# Altium PCB SW6121 Demo board.PcbDoc
Units mm, origin at the board's own origin, x right, y up, seen from the top; angles counter-clockwise.
Board outline 63.98 x 26 mm, 4 copper layers (Top Layer, Signal, power, Bottom Layer); 40 components, 37 nets, 159 pads, 294 vias.
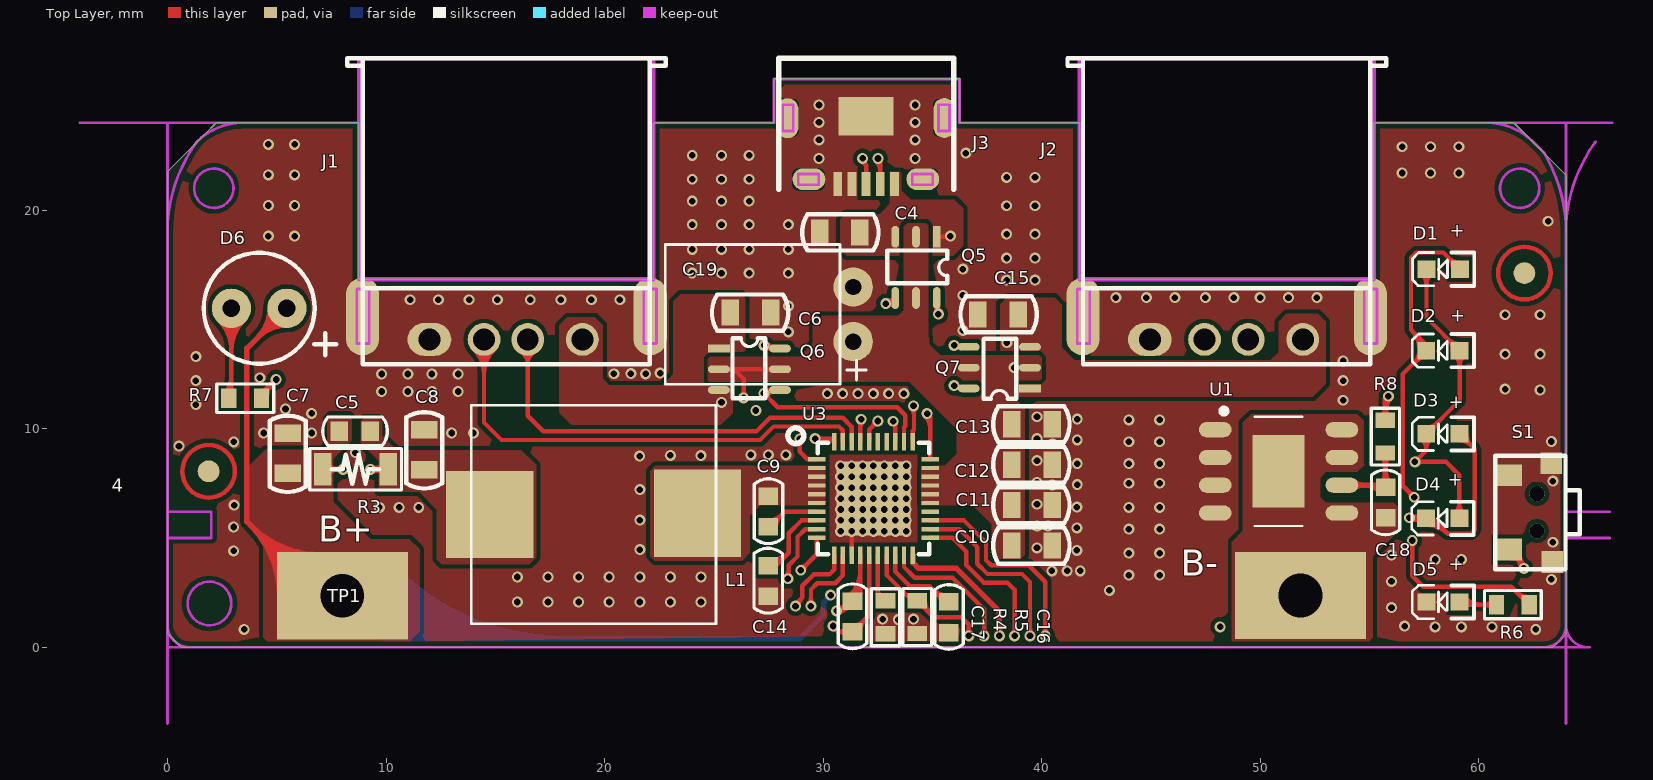
[diagram p0: Top Layer view]
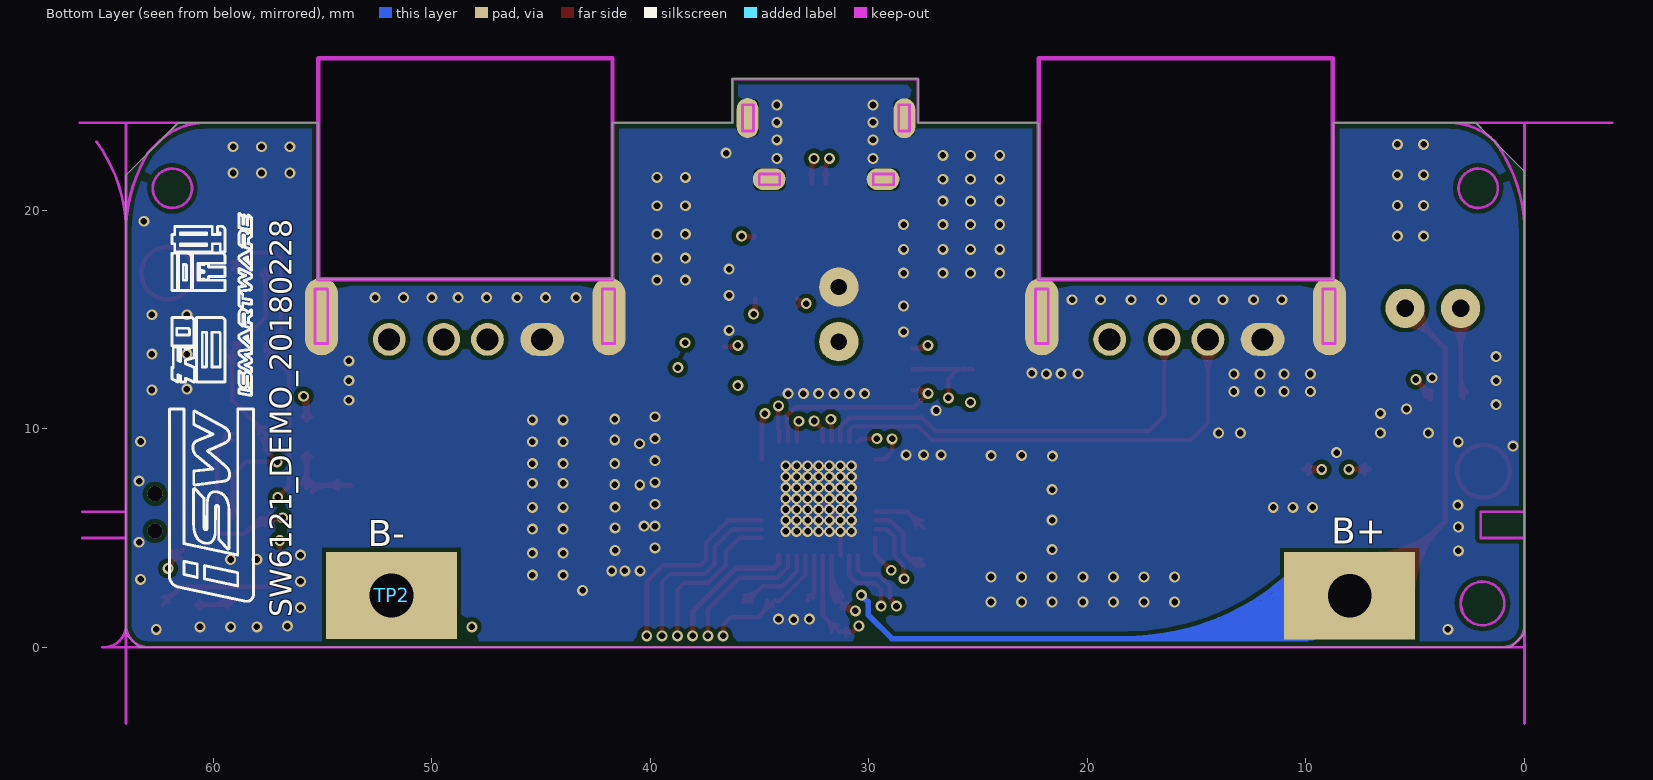
[diagram p1: Bottom Layer view, seen from below]
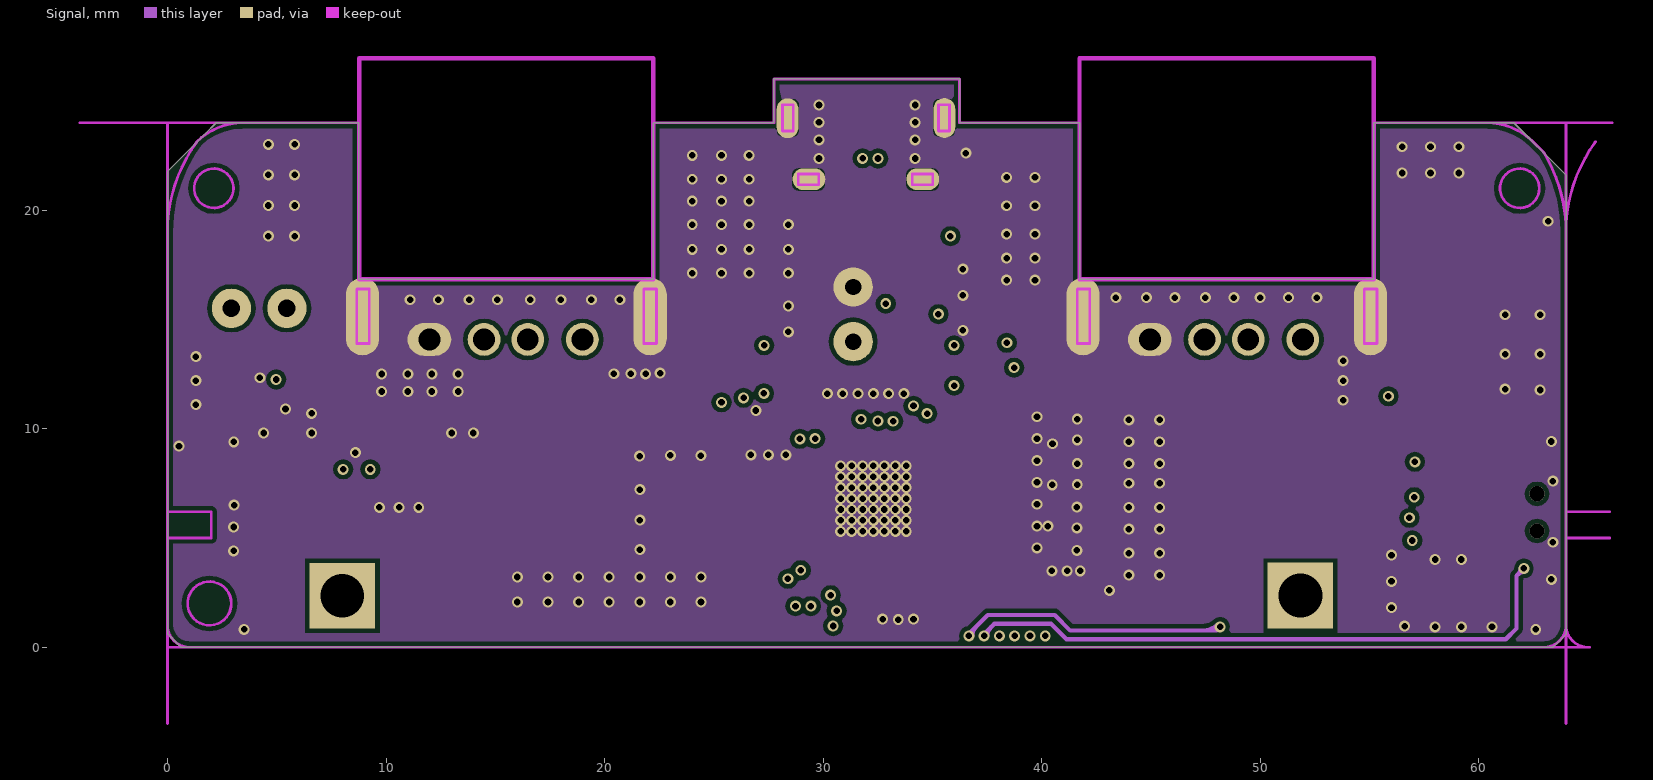
[diagram p2: Signal]
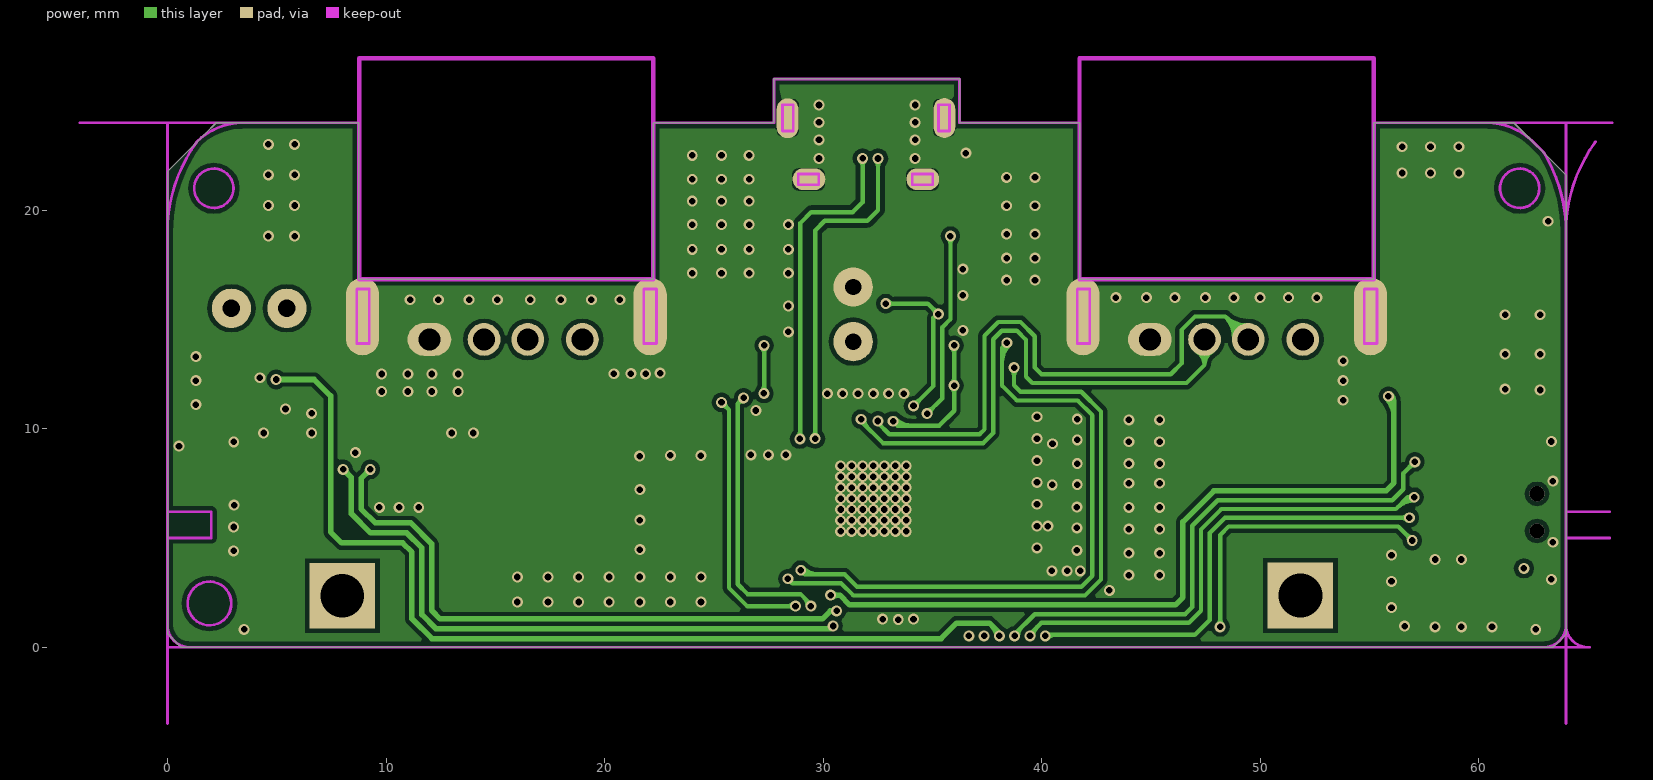
[diagram p3: power]

## Layer stack, top to bottom
Top Layer: signal copper 0.0356
Dielectric: core 0.32, FR-4, Dk 4.8
Signal: signal copper 0.0356
Dielectric: prepreg 0.32, FR-4, Dk 4.8
power: signal copper 0.0356
Dielectric: core 0.32, FR-4, Dk 4.8
Bottom Layer: signal copper 0.0356

## Board outline
1.084,0 0.623,0 0.131,0.492 0.022,0.601 0.022,2.061 0.022,21.787 1.718,23.483 2.235,24 8.754,24 8.754,16.855 8.767,16.841 22.227,16.841 22.227,23.957 22.27,24 27.75,24 27.75,26 27.753,26.003 36.264,26.003 36.264,24.003 36.266,24 41.749,24 41.749,16.853 41.737,16.841 55.197,16.841 55.197,23.977 55.22,24 60.376,24 61.606,24 63.196,22.41 64,21.606 64,19 64,0.583 63.563,0.146 63.42,0.003 63.014,0.003

## Design rules (kind name [scope] priority, off if disabled: settings)
Clearance [All] p1: gap=0.2
ComponentClearance [All] p1 off: gap=0.254 collisioncheckmode=3 verticalgap=0.254 showdistances=FALSE
FabricationTestpoint [(IsPad And (OnTopLayer Or OnBottomLayer))] p1: side=3 testpointundercomponent=TRUE minsize=1.016 maxsize=2.54 preferedsize=1.524 minholesize=0 maxholesize=1.016 preferedholesize=0.813 testpointgrid=0.025 allowsidetop=TRUE allowsidebottom=TRUE usegrid=TRUE gridtolerance=0
PolygonConnect [All] p1: connectstyle=Direct reliefconductorwidth=0.254 reliefentries=4 polygonreliefangle="90 Angle"
RoutingVias [All] p1: holewidth=0.4 width=0.6 viastyle="Through Hole" minholewidth=0.4 minwidth=0.6 maxholewidth=0.4 maxwidth=0.6
SilkscreenOverComponentPads [IsPad] p1: minsilkscreentomaskgap=0.254
SolderMaskExpansion [All] p1: expansion=0.102
Width [All] p1: maxlimit=2 minlimit=0.2 preferedwidth=0.2
25 further rules are at their usual default settings.

## Classes and differential pairs
component class SW6124_DEMO四层板: C4 C5 C6 C7 C8 C9 C10 C11 C12 C13 C14 C15 C16 D1 D2 D3 D4 D5 D6 J1 J3 L1 Q5 Q6 Q7 R3 R4 R5 R6 R7 S1 TP1 TP2

## Components (designator, comment, footprint, x,y, rotation, side; value= is the part's Value field where it differs from the comment)
C4 "C0805" C0805 30.79,18.98 r0 top
C5 "C0603" C0603 8.57,9.882 r180 top
C6 "C0805" C0805 26.664,15.312 r180 top
C7 "C0805" C0805 5.5,8.85 r270 top
C8 "C0805" C0805 11.75,9.01 r270 top
C9 "C0603" C0603 27.5,6.21 r270 top
C10 "C0805" C0805 39.53,6.5 r180 top
C11 "C0805" C0805 39.53,4.65 r180 top
C12 "C0805" C0805 39.53,10.2 r180 top
C13 "C0805" C0805 39.53,8.35 r180 top
C14 "C0603" C0603 27.49,3.03 r270 top
C15 "C0805" C0805 38.04,15.23 r0 top
C16 "C0603" C0603 35.76,1.37 r270 top
C17 "C0603" C0603 31.35,1.4 r270 top (schematic designator C3)
C18 "C0603" C0603 55.744,6.612 r270 top (schematic designator C3)
C19 "Comment" 点解电容6.3*8 30.78,15.23 r90 top
D1 "LED" LED_0603 59.155,17.241 r180 top locked
D2 "LED" LED_0603 59.142,13.513 r180 top locked
D3 "LED" LED_0603 59.142,9.703 r180 top locked
D4 "LED" LED_0603 59.13,5.836 r180 top locked
D5 "LED" LED_0603 59.144,2.01 r180 top locked
D6 "LED_5MM" LED_5MM 4.196,15.51 r180 top
J1 "TYPE-A-1" USB-A-06 15.52,14.6 r180 top locked
J2 "TYPE-A-1" USB-A-06 48.49,14.6 r180 top locked (schematic designator J1)
J3 "USB_MICRO_B" UMB05H217 31.953,22.755 r0 top locked (schematic designator U2)
L1 "SPM10102R2MESN" INDUCTOR_SPM1010 19.73,6.02 r180 top
Q5 "8205" SOT23-6 34.256,17.38 r180 top
Q6 "8205" SOT23-6 26.632,12.718 r270 top
Q7 "8205" SOT23-6 38.07,12.79 r90 top
R3 "R1206" R1206 8.61,8.14 r0 top
R4 "R0603" R0603 32.86,1.32 r270 top
R5 "R0603" R0603 34.31,1.33 r270 top
R6 "R0603" R0603 61.52,1.944 r180 top
R7 "R0603" R0603 3.507,11.391 r180 top
R8 "R0603" R0603 55.734,9.582 r270 top (schematic designator R4)
S1 "KEY" SMDTO024 63.382,3.909 r270 top locked
TP1 "B+" TIP_4*6 8.004,2.304 r0 top
TP2 "B-" TIP_4*6 51.846,2.312 r180 bottom
U1 "Comment" SOP-8-G 50.844,8.049 r0 top
U3 "Comment" QFN40_EPAD_SW6121_5X5 32.307,6.8 r0 top locked

## Footprints (in the part's own frame and the unit in brackets; to place one, negate y for a bottom-side part, rotate by r counter-clockwise, add the part's x,y. Pads: shape width x height; smd on the part's side, far side on the other; paste and mask are expansions set on the pad)
C0603 [mm]
  rect 0.8x0.9 smd: 1(0.7,0) 2(-0.7,0)
  silkscreen extent -1.49,-0.65 1.47,0.65, body extent -0.8,-0.4 0.8,0.4, height 0.8
C0805 [mm]
  rect 0.8x1.2 smd: 1(-0.95,0) 2(0.9,0)
  silkscreen extent -1.75,-0.82 1.75,0.82, body extent -1,-0.6 1,0.6, height 1.2
INDUCTOR_SPM1010 [mm]
  rect 4x4 smd: 1(4.975,-0.05) 2(-4.525,-0.1)
  silkscreen extent -5.38,-5.05 5.82,4.95
LED_5MM [mm]
  round 1.8 hole 0.8: 1(-1.27,0) 2(1.27,0)
  silkscreen extent -3.53,-2.54 2.54,2.54
LED_0603 [mm]
  rect 0.82x0.8 smd: 1(0.013,-0.057) 2(1.537,-0.057)
  silkscreen extent -0.65,-0.82 2.18,0.7
QFN40_EPAD_SW6121_5X5 [mm]
  rect 0.8x0.2 smd: 1(-2.6,1.8) 2(-2.6,1.4) 3(-2.6,1) 4(-2.6,0.6) 5(-2.6,0.2) 6(-2.6,-0.2) 7(-2.6,-0.6) 8(-2.6,-1) 9(-2.6,-1.4) 10(-2.6,-1.8) 21(2.6,-1.8) 22(2.6,-1.4) 23(2.6,-1) 24(2.6,-0.6) 25(2.6,-0.2) 26(2.6,0.2) 27(2.6,0.6) 28(2.6,1) 29(2.6,1.4) 30(2.6,1.8)
  rect 0.2x0.8 smd: 11(-1.8,-2.6) 12(-1.4,-2.6) 13(-1,-2.6) 14(-0.6,-2.6) 15(-0.2,-2.6) 16(0.2,-2.6) 17(0.6,-2.6) 18(1,-2.6) 19(1.4,-2.6) 20(1.8,-2.6) 31(1.8,2.6) 32(1.4,2.6) 33(1,2.6) 34(0.6,2.6) 35(0.2,2.6) 36(-0.2,2.6) 37(-0.6,2.6) 38(-1,2.6) 39(-1.4,2.6) 40(-1.8,2.6)
  rect 3.4x3.4 smd: 41(0,0)
  silkscreen extent -3.91,-2.55 2.55,3.24
R0603 [mm]
  rect 0.7x0.9 smd: 1(0.7,0) 2(-0.8,0)
  silkscreen extent -1.35,-0.65 1.25,0.65, body extent -0.85,-0.4 0.75,0.4, height 0.51
R1206 [mm]
  rect 0.8x1.5 smd: 1(-1.5,0) 2(1.5,0)
  silkscreen extent -2.1,-0.95 2.1,0.95, body extent -1.5,-0.75 1.5,0.75, height 0.61
SMDTO024 [mm]
  rect 1x1.2 smd: 1(-0.559,-2.006) 2(-3.959,-2.006)
  rect 1x1 smd: 3(0.011,-0.006) 4(-4.509,-0.056)
  round 0.7 hole 0.7 unplated: 5(-1.409,-0.706)
  round 0.7 hole 0.7: 6(-3.109,-0.706)
  silkscreen extent -4.86,-2.62 0.35,1.25
SOP-8-G [mm] "SOIC, 8-Leads, Body 4.9x3.9mm, Pitch 1.27mm,"
  rect 2.4x3.3 smd: 0(0,0)
  oval 1.5x0.7 smd: 1(-2.9,1.905) 2(-2.9,0.635) 3(-2.9,-0.635) 4(-2.9,-1.905) 5(2.9,-1.905) 6(2.9,-0.635) 7(2.9,0.635) 8(2.9,1.905)
  silkscreen extent -2.62,-2.5 1.1,2.88, body extent -2.97,-2.45 3.03,2.45, height 1.7
SOT23-6 [mm]
  rect 0.35x1 smd: 1(-0.95,-1.4)
  oval 0.35x1 smd: 2(0,-1.4) 3(0.95,-1.4) 4(0.95,1.4) 5(0,1.4) 6(-0.95,1.4)
  silkscreen extent -1.43,-0.78 1.33,0.72, body extent -1.45,-1.5 1.45,1.5, height 1.11
TIP_4*6 [mm]
  rect 6x4 / inner rect 3x3 / far side rect 6x4 hole 2: 1(-0.001,0.053)
UMB05H217 [mm]
  rect 0.4x1.1 smd: 1(1.317,-1.556) 2(0.667,-1.556) 3(0.017,-1.556) 4(-0.633,-1.556) 5(-1.283,-1.556)
  oval 1.5x1 all layers, no hole: 6(2.612,-1.34) 7(-2.598,-1.34)
  oval 1x1.829 all layers, no hole: 6(3.6,1.46) 7(-3.575,1.45)
  rect 1.524x1.778 smd: 8(0.517,1.544) 9(-0.483,1.544)
  Keep-Out Layer lines w0.127: -3.814,0.871 -3.314,0.871 -3.314,2.071 -3.814,2.071 -3.814,0.871 ; -3.086,-1.599 -3.086,-1.099 -2.146,-1.099 -2.146,-1.599 -3.086,-1.599 ; 2.128,-1.599 2.128,-1.099 3.068,-1.099 3.068,-1.599 2.128,-1.599 ; 3.333,0.871 3.833,0.871 3.833,2.071 3.333,2.071 3.333,0.871
  silkscreen extent -3.98,-1.8 4.02,4.2
USB-A-06 [mm]
  round 1.5 hole 1: 1(-3.467,0.519) 2(-0.967,0.519) 3(1.033,0.519)
  oval 2x1.5 hole 1: 4(3.533,0.519)
  oval 1.524x3.556 all layers, no hole: 6(-6.567,-0.531) 6(6.593,-0.531)
  Keep-Out Layer lines w0.127: 6.86,-1.774 6.86,0.709 6.286,0.709 6.286,-1.791 6.287,-1.79 6.845,-1.79 ; -6.28,-1.774 -6.28,0.709 -6.854,0.709 -6.854,-1.791 -6.853,-1.79 -6.295,-1.79
  Keep-Out Layer lines w0.203: 6.753,-2.241 -6.707,-2.241 -6.707,-12.341 6.753,-12.341 6.753,-2.241
  silkscreen extent -7.28,-12.35 7.3,1.65
点解电容6.3*8 [mm]
  round 1.8 hole 0.75: 1(-1.25,-0.6) 2(1.25,-0.6)
  silkscreen extent -3.2,-1.2 3.2,8

## Part data
S1: library part "SW K"
TP1 TP2: library part "Test Point"

## Free pads (board coordinates)
  round 1 smd: 0(1.884,8.049) 0(62.096,17.118)

## Via types
v1: diameter 0.5, hole 0.3, Top Layer to Bottom Layer, tented both sides, 293 vias
v2: diameter 0.1, hole 0.1, Top Layer to Bottom Layer, tented both sides, 1 vias

## Nets (pads, with @x,y where several pads share a name; then routed paths per layer and width w, separated by ;. In a path a pad name is that pad's centre, name@x,y a point inside that pad or via, vN(x,y) a via of type N, cw(c..) or ccw(c..) an arc to the next point about the centre after c; other vN are vias at no path point)
AGND: C4.1 C6.1 C7.1 C8.1 C10.1 C11.1 C12.1 C13.1 C14.1 C15.1 C16.1 C19.2 D5.2 J1.4 J1.6 J2.4 J2.6 J3.4 J3.5 J3.6 J3.7 J3.8 J3.9 R4.1 R5.1 S1.2 S1.3 S1.4 U1.1 U1.2 U1.3 U1.4 U3.13 U3.41 | length 3
  Top Layer w0.2: U3.13 v1(31.307,5.3) v1(31.307,5.8) v2(32.307,6.8)
  other v1: 3.507,0.812 62.614,0.812 58.014,0.932 59.214,0.932 60.614,0.932 56.614,0.962 33.44,1.26 32.73,1.28 34.14,1.28 56.014,1.812 16.014,2.067 17.414,2.067 18.814,2.067 20.214,2.067 21.614,2.067 23.014,2.067 24.414,2.067 43.1,2.6 56.014,3.012 63.326,3.104 16.014,3.212 17.414,3.212 18.814,3.212 20.214,3.212 21.614,3.212 23.014,3.212 24.414,3.212 44,3.3 45.4,3.3 40.47,3.49 41.17,3.49 41.77,3.49 58.014,4.012 59.214,4.012 56.014,4.212 44,4.3 45.4,4.3 3.03,4.41 41.62,4.427 21.614,4.468 39.79,4.54 63.4,4.8 30.807,5.3 31.807,5.3 32.307,5.3 32.807,5.3 33.307,5.3 33.807,5.3 44,5.4 45.4,5.4 41.62,5.46 3.03,5.5 39.79,5.54 40.29,5.54 21.614,5.812 30.807,5.8 31.807,5.8 32.307,5.8 32.807,5.8 33.307,5.8 33.807,5.8 30.807,6.3 31.307,6.3 31.807,6.3 32.307,6.3 32.807,6.3 33.307,6.3 33.807,6.3 9.7,6.4 10.6,6.4 11.5,6.4 44,6.4 45.4,6.4 41.62,6.412 3.05,6.5 39.79,6.54 30.807,6.8 31.307,6.8 31.807,6.8 32.307,6.8 32.807,6.8 33.307,6.8 33.807,6.8 21.614,7.212 30.807,7.3 31.307,7.3 31.807,7.3 32.307,7.3 32.807,7.3 33.307,7.3 33.807,7.3 40.49,7.43 41.633,7.435 44,7.5 45.4,7.5 39.79,7.54 63.4,7.6 30.807,7.8 31.307,7.8 31.807,7.8 32.307,7.8 32.807,7.8 33.307,7.8 33.807,7.8 30.807,8.3 31.307,8.3 31.807,8.3 32.307,8.3 32.807,8.3 33.307,8.3 33.807,8.3 41.633,8.4 44,8.4 45.4,8.4 39.79,8.54 21.61,8.74 23.01,8.78 24.41,8.77 26.7,8.8 27.5,8.8 28.3,8.8 8.6,8.9 0.528,9.197 40.5,9.31 3.034,9.394 44,9.4 45.4,9.4 63.326,9.412 41.633,9.483 39.79,9.54 4.4,9.8 6.6,9.8 13,9.8 14,9.8 44,10.4 45.4,10.4 41.633,10.435 39.79,10.546 6.6,10.7 26.93,10.83 5.4,10.9 1.3,11.1 53.8,11.3 30.2,11.6 30.9,11.6 31.6,11.6 32.3,11.6 33,11.6 33.7,11.6 9.8,11.7 11,11.7 12.1,11.7 13.3,11.7 62.814,11.768 61.214,11.812 1.3,12.2 53.8,12.2 4.226,12.328 9.8,12.5 11,12.5 12.1,12.5 13.3,12.5 20.426,12.514 21.209,12.517 21.881,12.503 22.547,12.538 53.8,13.1 1.3,13.3 61.214,13.412 62.814,13.412 28.414,14.432 36.4,14.5 61.214,15.212 62.814,15.212 28.414,15.612 11.1,15.9 12.4,15.9 13.8,15.9 15.1,15.9 16.6,15.9 18,15.9 19.4,15.9 20.7,15.9 43.4,16 44.8,16 46.1,16 47.5,16 48.8,16 50,16 51.3,16 52.6,16 36.4,16.1 38.4,16.8 39.7,16.8 24.014,17.118 25.354,17.118 26.614,17.118 28.414,17.118 36.4,17.3 38.4,17.8 39.7,17.8 24.014,18.202 25.354,18.202 26.614,18.202 28.414,18.202 4.614,18.812 5.814,18.812 38.4,18.9 39.7,18.9 24.014,19.337 25.354,19.337 26.614,19.337 28.414,19.337 63.184,19.492 4.614,20.212 5.814,20.212 38.4,20.2 39.7,20.2 24.014,20.412 25.354,20.412 26.614,20.412 24.014,21.412 25.354,21.412 26.614,21.412 38.4,21.5 39.7,21.5 4.614,21.612 5.814,21.612 56.5,21.7 57.8,21.7 59.1,21.7 29.814,22.362 34.214,22.362 24.014,22.502 25.354,22.502 26.614,22.502 36.534,22.612 56.5,22.9 57.8,22.9 59.1,22.9 4.614,23.012 5.814,23.012 29.814,23.212 34.214,23.212 29.814,24.012 34.214,24.012 29.814,24.812 34.214,24.812
B-: C18.1 TP2.1 U1.0 U1.5 U1.7 U1.8
BAT: C5.1 C7.2 C17.1 D6.1 R3.1 R8.2 TP1.1 U3.15 | length 229.3
  Top Layer w0.2: v1@30.46,0.82 cw(c30.46,0.458) 30.716,0.714 cw(c30.972,0.97) v1@30.61,0.97 ; v1(30.46,0.97) 30.73,0.7 ; C17.1@31.053,0.53 ccw(c30.73,0.309) 30.73,0.7 ; C17.1@31.053,0.87 cw(c30.73,1.091) 30.73,0.7 ; C17.1@31.4,1 ccw(c31.4,1.604) 31.827,1.177 ; C17.1@31.7,0.7 cw(c32.545,0.7) 31.947,1.297 ; U3.15 32.107,1.457 C17.1 30.73,0.7
  Top Layer w0.254: 3.796,5.58 cw(c0.573,2.357) TP1.1@5.131,2.357 ; 3.832,5.544 ccw(c7.004,8.716) TP1.1@7.004,4.23 ; 4.229,5.147 cw(c1.44,2.357) TP1.1@5.385,2.357 ; 4.265,5.11 ccw(c7.004,7.849) TP1.1@7.004,3.976 ; 4.663,4.713 cw(c2.307,2.357) TP1.1@5.639,2.357 ; D6.1@4.693,15.51 cw(c2.827,15.51) 4.146,14.19 cw(c5.466,12.871) D6.1@5.466,14.737 ; 4.699,4.677 ccw(c7.004,6.981) TP1.1@7.004,3.722 ; D6.1@4.947,15.51 cw(c3.694,15.51) 4.58,14.624 cw(c5.466,13.738) D6.1@5.466,14.991 ; TP1.1@5.096,4.279 cw(c3.174,2.357) TP1.1@5.893,2.357 ; TP1.1@5.133,4.243 ccw(c7.004,6.114) TP1.1@7.004,3.468 ; D6.1 3.63,13.674 3.63,5.746 7.019,2.357 TP1.1 ; TP1.1@5.53,3.846 cw(c4.042,2.357) TP1.1@6.147,2.357 ; TP1.1@5.566,3.81 ccw(c7.004,5.247) TP1.1@7.004,3.214 ; R3.1 v1(8.04,8.14) ; R3.1@7.303,7.947 cw(c7.769,7.481) 7.769,8.14 cw(c7.769,8.799) R3.1@7.303,8.333 ; v1@7.953,8.053 ccw(c7.743,7.843) 7.743,8.14 ccw(c7.743,8.437) v1@7.953,8.227 ; R8.2@55.576,10.54 ccw(c55.196,10.92) 55.734,10.92 ccw(c56.272,10.92) R8.2@55.892,10.54 ; R8.2 55.734,11.342 v1(55.874,11.482) ; 55.734,10.847 cw(c56.509,10.847) v1@55.961,11.395
  power w0.254: v1@8.04,8.017 cw(c8.04,7.72) 8.25,7.93 cw(c8.46,8.14) v1@8.163,8.14 ; v1(8.04,8.14) 8.41,7.77 8.41,6.11 9.29,5.23 10.95,5.23 11.64,4.54 11.64,1.49 12.285,0.844 30.334,0.844 v1(30.46,0.97) ; v1(30.35,2.38) 30.77,2.38 31.211,1.939 46.124,1.939 46.467,2.282 46.467,5.73 47.886,7.149 55.764,7.149 56.127,7.512 56.127,11.229 v1(55.874,11.482) ; v1@30.437,2.293 cw(c30.647,2.083) 30.647,2.38 cw(c30.647,2.677) v1@30.437,2.467 ; v1@55.787,11.395 cw(c54.966,10.574) 56.127,10.574 ; v1@55.874,11.359 cw(c55.874,11.062) 56.084,11.272 cw(c56.294,11.482) v1@55.997,11.482 ; v1@55.967,11.574 cw(c55.58,11.187) 56.127,11.187
  Bottom Layer w0.254: TP1.1@7.993,1.347 ccw(c10.302,3.655) TP1.1@10.302,0.39 ; TP1.1 9.97,0.39 28.945,0.39 30.04,1.485 30.04,2.07 v1(30.35,2.38) ; TP1.1@8.173,1.526 ccw(c10.915,4.269) TP1.1@10.915,0.39 ; TP1.1@8.352,1.706 ccw(c11.528,4.882) 11.528,0.39 ; TP1.1@8.532,1.886 ccw(c12.142,5.495) 12.142,0.39 ; TP1.1@8.712,2.065 ccw(c12.755,6.108) 12.755,0.39 ; TP1.1@8.891,2.245 ccw(c13.368,6.721) 13.368,0.39 ; TP1.1@9.071,2.424 ccw(c13.981,7.335) 13.981,0.39 ; TP1.1@9.25,2.604 ccw(c14.594,7.948) 14.594,0.39 ; TP1.1@9.43,2.784 ccw(c15.208,8.561) 15.208,0.39 ; TP1.1@9.61,2.963 ccw(c15.821,9.174) 15.821,0.39 ; TP1.1@9.789,3.143 ccw(c16.434,9.788) 16.434,0.39 ; TP1.1@9.969,3.322 ccw(c17.047,10.401) 17.047,0.39 ; TP1.1@10.148,3.502 ccw(c17.66,11.014) 17.66,0.39 ; TP1.1@10.328,3.682 ccw(c18.274,11.627) 18.274,0.39 ; v1@30.227,2.38 cw(c29.93,2.38) 30.14,2.17 cw(c30.35,1.96) v1@30.35,2.257
BATCSP: C5.2 C8.2 C17.2 L1.1 R3.2 U3.14 | length 40.3
  Top Layer w0.2: v1@30.619,1.61 ccw(c30.633,2.158) C17.2@31.02,1.77 ; v1(30.62,1.66) 30.91,1.66 ; v1@30.624,1.81 ccw(c30.649,2.801) C17.2 ; v1@30.742,1.573 cw(c30.91,1.455) 30.91,1.66 ; v1@30.742,1.747 ccw(c30.91,1.865) 30.91,1.66 ; C17.2@31.01,2.025 cw(c30.64,1.93) 30.91,1.66 ; C17.2@31.188,2.312 ccw(c29.935,3.565) 31.707,3.565 ; C17.2@31.281,1.801 ccw(c31.252,1.318) 30.91,1.66 ; C17.2@31.329,2.171 ccw(c30.417,3.083) 31.707,3.083 ; C17.2@31.471,2.029 ccw(c30.9,2.6) 31.707,2.6 ; U3.14 31.707,2.457 C17.2 ; 30.91,1.66 C17.2
  Top Layer w0.254: v1(9.28,8.14) R3.2 ; v1@9.341,8.033 cw(c9.565,7.646) 9.681,8.078 ; v1@9.341,8.247 ccw(c9.565,8.634) 9.681,8.202 ; v1@9.367,8.053 cw(c9.577,7.843) 9.577,8.14 cw(c9.577,8.437) v1@9.367,8.227 ; R3.2@9.917,7.947 ccw(c9.451,7.481) 9.451,8.14 ccw(c9.451,8.799) R3.2@9.917,8.333
  power w0.254: v1@9.157,8.14 cw(c8.86,8.14) 9.07,7.93 cw(c9.28,7.72) v1@9.28,8.017 ; v1(9.28,8.14) 8.864,7.724 8.864,6.33 9.51,5.684 11.138,5.684 12.094,4.728 12.094,1.678 12.474,1.298 29.973,1.298 30.334,1.66 ; v1@30.531,1.575 ccw(c30.334,1.389) 30.334,1.66 ; v1@30.531,1.745 cw(c30.334,1.931) 30.334,1.66 ; v1(30.62,1.66) 30.334,1.66
BSET/HLED: R5.2 R6.2 U3.17 | length 45.1
  Top Layer w0.2: U3.17 32.907,3.297 34.074,2.13 R5.2 35.07,1.37 36.334,1.37 36.67,1.034 v1(36.67,0.52) ; R5.2@34.41,1.88 cw(c34.41,1.518) 34.666,1.774 ; R5.2@34.66,2.13 ccw(c35.505,2.13) 34.907,1.533 ; v1@36.564,0.626 ccw(c36.308,0.882) 36.67,0.882 ccw(c37.032,0.882) v1@36.776,0.626 ; v1@56.858,4.776 cw(c56.602,4.52) 56.964,4.52 cw(c57.326,4.52) v1@57.07,4.776 ; v1(56.964,4.882) 56.964,3.272 57.469,2.767 61.498,2.767 R6.2 ; 61.723,2.542 ccw(c62.32,3.139) R6.2@62.32,2.294 ; 61.964,2.3 cw(c61.708,2.044) R6.2@62.07,2.044
  Signal w0.2: v1(36.67,0.52) 36.67,0.598 37.542,1.47 40.599,1.47 41.306,0.763 48.006,0.763 v1(48.174,0.932) ; v1@36.82,0.52 cw(c37.37,0.52) 36.981,0.909 ; 47.406,0.763 ccw(c47.406,1.7) v1@48.068,1.038 ; 47.888,0.763 ccw(c47.888,1.218) v1@48.209,0.896
  power w0.2: v1@48.068,1.038 ccw(c47.812,1.294) 48.174,1.294 ccw(c48.536,1.294) v1@48.28,1.038 ; v1(48.174,0.932) 48.174,5.136 48.56,5.522 56.324,5.522 v1(56.964,4.882) ; v1@56.814,4.882 ccw(c56.452,4.882) 56.708,5.138 ccw(c56.964,5.394) v1@56.964,5.032
BST: C9.1 U3.7 | length 3.7
  Top Layer w0.2: C9.1@27.5,5.45 28.25,6.2 U3.7 ; C9.1@27.55,5.81 ccw(c27.55,6.558) 28.079,6.029 ; C9.1@27.85,5.51 cw(c28.55,5.51) 28.055,6.005
CC1: 
CC2: 
DMA: J1.2 U3.38 | length 21.9
  Top Layer w0.2: J1.2@16.179,13.509 cw(c15.899,12.992) 16.487,12.992 ; J1.2@16.274,13.685 cw(c16.08,13.327) 16.487,13.327 cw(c16.895,13.327) J1.2@16.701,13.685 ; J1.2 16.487,12.992 ; J1.2@16.796,13.509 ccw(c17.075,12.992) 16.487,12.992 ; U3.38 31.307,10.09 30.897,10.5 27.572,10.5 26.954,9.882 17.194,9.882 16.487,10.589 16.487,12.991
DMB: J3.2 U3.40 | length 20.3
  Top Layer w0.2: v1(29.64,9.54) 30.367,9.54 U3.40 ccw(c30.169,9.062) 30.169,9.54 ; v1@29.746,9.434 cw(c30.002,9.178) 30.002,9.54 cw(c30.002,9.902) v1@29.746,9.646 ; v1@32.408,22.256 cw(c31.895,21.743) J3.2@32.62,21.743 ; v1(32.514,22.362) 32.62,22.256 J3.2 ; J3.2@32.55,21.62 ccw(c32.379,21.791) 32.62,21.791 ccw(c32.862,21.791) J3.2@32.691,21.62
  power w0.2: v1@29.534,9.646 ccw(c29.278,9.902) 29.64,9.902 ccw(c30.002,9.902) v1@29.746,9.646 ; v1(29.64,9.54) 29.64,19.07 30.08,19.51 32.03,19.51 32.514,19.994 v1(32.514,22.362) ; v1@32.408,22.256 cw(c32.152,22) 32.514,22 cw(c32.876,22) v1@32.62,22.256
DMC: J2.2 U3.36 | length 31.7
  Top Layer w0.2: U3.36 32.107,9.947 v1(32.51,10.35) ; v1@32.36,10.35 cw(c31.998,10.35) 32.254,10.094 cw(c32.51,9.838) v1@32.51,10.2
  power w0.2: v1(32.51,10.35) 32.51,10.262 33.032,9.74 37.164,9.74 37.39,9.966 37.39,14.254 38.017,14.88 39.036,14.88 39.69,14.226 39.69,12.8 40,12.49 45.91,12.49 46.407,12.987 46.407,14.516 47.022,15.131 48.407,15.131 ; J2.2@48.808,14.107 ccw(c47.438,14.162) 48.407,15.131 ; J2.2@49.008,14.099 ccw(c48.059,14.137) 48.73,14.808 ccw(c49.402,15.479) J2.2@49.439,14.531 ; J2.2@49.431,14.731 cw(c49.377,16.101) 48.407,15.131 ; J2.2 48.407,15.131
DPA: J1.3 U3.39 | length 25.6
  Top Layer w0.2: J1.3@14.028,13.622 cw(c12.92,12.513) 14.487,12.513 ; J1.3@14.169,13.763 cw(c13.402,12.996) 14.487,12.996 ; 14.487,12.511 cw(c16.058,12.511) J1.3@14.947,13.622 ; 14.487,12.993 cw(c15.575,12.993) J1.3@14.806,13.763 ; J1.3@14.487,14.081 14.487,10.282 15.287,9.482 27.12,9.482 27.738,10.1 30.731,10.1 30.907,9.924 U3.39
DPB: J3.3 U3.1 | length 20.5
  Top Layer w0.2: v1@28.834,9.424 cw(c28.578,9.168) 28.94,9.168 cw(c29.302,9.168) v1@29.046,9.424 ; v1(28.94,9.53) 28.94,8.94 29.28,8.6 U3.1 ; 29.19,8.69 ccw(c29.407,8.907) U3.1@29.407,8.6 ; v1(31.81,22.37) 31.81,22.206 31.97,22.046 ; J3.3@31.9,21.62 ccw(c31.729,21.791) 31.97,21.791 ccw(c32.212,21.791) J3.3@32.041,21.62 ; v1@31.939,22.294 ccw(c32.115,22.19) 31.97,22.046 ; J3.3 31.97,22.046
  power w0.2: v1@28.834,9.636 ccw(c28.52,9.95) 28.964,9.95 ; v1(28.94,9.53) 28.964,9.554 28.964,19.414 29.46,19.91 31.36,19.91 31.81,20.36 v1(31.81,22.37) ; 28.964,9.834 ccw(c29.244,9.834) v1@29.046,9.636 ; v1@31.704,22.264 cw(c31.448,22.008) 31.81,22.008 cw(c32.172,22.008) v1@31.916,22.264
DPC: J2.3 U3.37 | length 28.9
  Top Layer w0.2: v1@31.634,10.324 cw(c31.458,10.148) 31.707,10.148 ; U3.37 31.707,10.397 v1(31.74,10.43) ; 31.707,9.988 cw(c32.182,9.988) v1@31.846,10.324
  power w0.2: v1(31.74,10.43) 31.74,10.342 32.742,9.34 37.33,9.34 37.79,9.8 37.79,14.088 38.182,14.48 38.87,14.48 39.29,14.06 39.29,12.37 39.57,12.09 46.63,12.09 47.457,12.917 ; v1@31.89,10.43 ccw(c32.464,10.43) 32.058,10.024 ; J2.3@47.116,13.528 cw(c46.74,12.917) 47.457,12.917 ; J2.3@47.221,13.698 cw(c46.961,13.276) 47.457,13.276 cw(c47.954,13.276) J2.3@47.693,13.698 ; J2.3 47.457,12.917 ; J2.3@47.798,13.528 ccw(c48.174,12.917) 47.457,12.917
GATE_A: Q6.4 Q6.6 U3.32 | length 16.7
  Top Layer w0.2: v1@27.259,11.647 cw(c27.551,11.356) Q6.4@27.551,11.768 ; v1@27.269,13.776 ccw(c27.53,14.038) 27.53,13.668 ; v1@27.294,11.462 cw(c27.294,11.1) 27.55,11.356 cw(c27.806,11.612) v1@27.444,11.612 ; v1(27.304,13.812) 27.448,13.668 Q6.6 ; v1@27.4,11.506 cw(c28.032,10.876) Q6.4 27.451,11.768 v1(27.294,11.612) 27.926,10.98 30.14,10.98 33.398,10.98 33.76,10.618 33.76,10.112 33.707,10.059 U3.32 ; v1@27.41,13.918 ccw(c28.013,14.52) Q6.6@28.013,13.668 ; v1@27.439,11.572 cw(c27.767,11.48) Q6.4@27.679,11.809 ; v1@27.45,13.848 ccw(c27.739,13.92) Q6.6@27.662,13.632 ; Q6.4@27.654,11.715 ccw(c27.526,11.587) 27.526,11.768 ccw(c27.526,11.949) Q6.4@27.654,11.821 ; Q6.6@27.654,13.615 ccw(c27.526,13.487) 27.526,13.668 ccw(c27.526,13.849) Q6.6@27.654,13.721
  power w0.2: v1@27.188,11.718 ccw(c26.908,11.998) 27.304,11.998 ; v1@27.198,13.706 cw(c26.942,13.45) 27.304,13.45 cw(c27.666,13.45) v1@27.41,13.706 ; v1@27.294,11.762 27.304,11.772 v1(27.304,13.812) ; 27.304,11.95 ccw(c27.632,11.95) v1@27.4,11.718
GATE_B: Q5.4 Q5.6 U3.31 | length 15.2
  Top Layer w0.2: v1(32.87,15.72) v1@33.046,15.72 ; v1@32.904,15.866 ccw(c33.003,16.283) Q5.4 v1@33.046,15.72 ; v1@32.968,15.72 cw(c32.968,15.317) Q5.4@33.252,15.602 ; v1@32.99,15.63 cw(c33.093,15.553) 33.127,15.677 cw(c33.174,15.853) v1@33.007,15.78 ; Q5.4@33.243,15.614 ccw(c33.046,15.484) v1@33.046,15.72 ; v1@34.034,10.934 cw(c33.73,10.63) 34.16,10.63 ; U3.31 34.107,9.894 34.16,9.947 34.16,11.02 v1(34.14,11.04) ; 34.16,10.726 cw(c34.454,10.726) v1@34.246,10.934 ; v1@35.15,15.315 ccw(c34.87,15.477) Q5.6@35.182,15.56 ; Q5.6@35.152,15.602 cw(c35.024,15.474) 35.206,15.474 cw(c35.387,15.474) Q5.6@35.259,15.602 ; Q5.6@35.176,15.584 ccw(c35.494,15.669) v1@35.347,15.374 ; Q5.6@35.206,15.782 ccw(c35.822,15.782) v1@35.386,15.346 ; Q5.6 35.206,15.314 v1(35.28,15.24)
  power w0.2: v1(32.87,15.72) 33.69,15.72 34.8,15.72 v1@35.25,15.27 ; v1@32.976,15.614 cw(c33.232,15.358) 33.232,15.72 cw(c33.232,16.082) v1@32.976,15.826 ; v1(34.14,11.04) 35.05,11.95 35.05,15.07 v1@35.25,15.27 ; v1@34.14,11.19 ccw(c34.14,11.552) 34.396,11.296 ccw(c34.652,11.04) v1@34.29,11.04 ; v1@35.13,15.24 ccw(c34.768,15.24) 35.024,15.496 ccw(c35.28,15.752) v1@35.28,15.39 ; v1(35.28,15.24) v1@35.25,15.27
GATE_C: Q7.4 Q7.6 U3.33 | length 12
  Top Layer w0.2: v1(33.21,10.34) 33.307,10.243 U3.33 ; v1(36,13.81) 36.07,13.74 Q7.4 ; v1@36.075,13.68 cw(c36.213,13.441) Q7.4@36.285,13.708 ; v1@36.106,13.916 ccw(c36.531,14.341) Q7.4@36.531,13.74 ; v1@36.144,13.853 ccw(c36.353,13.916) Q7.4@36.297,13.704 ; Q7.4@36.292,13.687 ccw(c36.164,13.559) 36.164,13.74 ccw(c36.164,13.921) Q7.4@36.292,13.793
  power w0.2: v1@33.175,10.305 ccw(c33.572,10.702) 33.572,10.14 ; v1(33.21,10.34) 33.41,10.14 35.32,10.14 36,10.82 v1(36,11.97) v1(36,13.81) ; v1@33.316,10.446 ccw(c34.055,11.185) 34.055,10.14 ; v1@35.894,11.864 cw(c35.638,11.608) 36,11.608 cw(c36.362,11.608) v1@36.106,11.864 ; v1@35.894,12.076 ccw(c35.638,12.332) 36,12.332 ccw(c36.362,12.332) v1@36.106,12.076 ; v1@35.894,13.704 cw(c35.638,13.448) 36,13.448 cw(c36.362,13.448) v1@36.106,13.704
KEY: S1.1 U3.19 | length 39.7
  Top Layer w0.2: U3.19 33.707,3.673 34.2,3.18 35.924,3.18 37.37,1.734 v1(37.37,0.52) ; v1@37.264,0.626 ccw(c37.008,0.882) 37.37,0.882 ccw(c37.732,0.882) v1@37.476,0.626 ; S1.1 v1@62.074,3.77 ; S1.1@61.476,4.068 cw(c61.476,3.344) 61.988,3.856 ; S1.1@61.674,4.435 ccw(c62.116,4.362) S1.1@61.799,4.045 ; S1.1@61.699,4.145 cw(c61.155,3.602) v1@61.924,3.602 ; S1.1@61.871,4.403 ccw(c62.588,4.284) v1@62.074,3.77 ; S1.1@61.91,4.054 cw(c61.524,3.831) v1@61.936,3.66 ; v1(62.074,3.602) v1@62.074,3.77
  Signal w0.2: v1(37.37,0.52) 37.37,0.598 37.842,1.07 40.434,1.07 41.14,0.363 61.246,0.363 61.737,0.854 61.737,3.264 v1(62.074,3.602) ; v1@37.52,0.52 cw(c38.07,0.52) 37.681,0.909 ; v1@61.924,3.602 cw(c61.562,3.602) 61.818,3.346 cw(c62.074,3.09) v1@62.074,3.452
LED1: D1.2 D2.1 D3.2 D4.1 U3.21 | length 55.7
  Top Layer w0.2: U3.21 35.93,5 36.56,4.37 36.56,3.752 37.362,2.95 38.44,2.95 38.77,2.62 v1(38.77,0.52) ; v1@38.664,0.626 ccw(c38.408,0.882) 38.77,0.882 ccw(c39.132,0.882) v1@38.876,0.626 ; v1@57.084,8.632 ccw(c57.084,8.994) 57.34,8.738 ccw(c57.596,8.482) v1@57.234,8.482 ; v1@57.19,8.376 cw(c57.446,8.12) 57.446,8.482 cw(c57.446,8.844) v1@57.19,8.588 ; D3.2@57.394,9.548 cw(c56.881,9.036) 57.606,9.036 cw(c58.33,9.036) D3.2@57.818,9.548 ; D1.2@57.406,17.086 cw(c56.894,16.573) 57.618,16.573 cw(c58.343,16.573) D1.2@57.831,17.086 ; D3.2@57.616,10.06 ccw(c57.616,10.76) 58.111,10.265 ; D1.2 57.618,15.082 D2.1 59.13,11.284 D3.2 57.606,9.003 v1(57.084,8.482) 58.507,8.482 59.117,7.872 D4.1 ; D3.2@57.916,9.76 cw(c58.664,9.76) 58.135,10.289 ; 58.601,14.099 cw(c58.071,13.57) D2.1@58.82,13.57 ; 58.625,14.075 ccw(c59.12,14.57) D2.1@59.12,13.87 ; D4.1@58.905,6.105 ccw(c58.393,6.617) 59.117,6.617 ccw(c59.841,6.617) D4.1@59.329,6.105 ; D2.1@58.918,13.358 cw(c58.405,12.846) 59.13,12.846 cw(c59.854,12.846) D2.1@59.342,13.358
  power w0.2: v1(38.77,0.52) 38.77,0.598 39.684,1.512 46.568,1.512 46.894,1.838 46.894,5.553 48.063,6.722 56.048,6.722 56.554,7.228 56.554,7.952 v1(57.084,8.482) ; v1@38.92,0.52 cw(c39.47,0.52) 39.081,0.909 ; v1@56.934,8.482 cw(c56.572,8.482) 56.828,8.226 cw(c57.084,7.97) v1@57.084,8.332
LED2: D1.1 D2.2 U3.22 | length 52.8
  Top Layer w0.2: U3.22 36.24,5.4 37.06,4.58 37.06,3.818 37.528,3.35 39.1,3.35 39.47,2.98 v1(39.47,0.52) ; v1@39.364,0.626 ccw(c39.108,0.882) 39.47,0.882 ccw(c39.832,0.882) v1@39.576,0.626 ; v1@56.904,6.862 ccw(c56.542,6.862) 56.798,7.118 ccw(c57.054,7.374) v1@57.054,7.012 ; v1(57.054,6.862) 56.534,7.382 56.534,12.499 D2.2 57.606,13.831 56.908,14.529 ; 57.077,13.041 ccw(c56.547,13.57) D2.2@57.296,13.57 ; 57.101,13.065 cw(c57.596,12.57) D2.2@57.596,13.27 ; 57.243,14.194 cw(c56.633,13.584) D2.2@57.496,13.572 ; D2.2@57.296,13.574 ccw(c55.973,13.593) 56.908,14.528 ; 58.613,17.827 cw(c58.084,17.298) D1.1@58.832,17.298 ; 58.637,17.803 ccw(c59.132,18.298) D1.1@59.132,17.598 ; D1.1 58.38,18.06 57.146,18.06 56.908,17.822 56.908,14.529
  power w0.2: v1(39.47,0.52) 39.47,0.598 39.984,1.112 46.734,1.112 47.294,1.672 47.294,5.388 48.228,6.322 56.214,6.322 56.754,6.862 ; v1@39.62,0.52 cw(c40.17,0.52) 39.781,0.909 ; 56.286,6.394 cw(c57.054,5.625) v1@57.054,6.712 ; 56.627,6.735 cw(c57.054,6.308) v1@57.054,6.912 ; v1@56.934,6.772 ccw(c56.754,6.637) 56.754,6.862 ; v1@56.934,6.952 cw(c56.754,7.087) 56.754,6.862 ; v1(57.054,6.862) 56.754,6.862
LED3: D3.1 D4.2 U3.23 | length 46
  Top Layer w0.2: U3.23 36.45,5.8 37.46,4.79 37.46,3.983 37.693,3.75 39.41,3.75 40.17,2.99 v1(40.17,0.52) ; v1@40.064,0.626 ccw(c39.808,0.882) 40.17,0.882 ccw(c40.532,0.882) v1@40.276,0.626 ; v1(56.834,5.922) v1@56.863,5.893 ; v1@56.909,5.792 cw(c57.056,5.538) 57.131,5.821 ; v1@56.938,6.03 ccw(c57.1,6.201) 57.161,5.973 ; v1@56.94,5.816 cw(c57.127,5.629) 57.127,5.893 ; v1@56.94,6.028 ccw(c57.265,6.353) D4.2@57.265,5.893 ; v1@56.964,5.847 cw(c57.174,5.726) 57.111,5.96 ; v1@56.964,5.997 ccw(c57.338,6.212) D4.2@57.226,5.796 ; D4.2@57.37,5.682 ccw(c56.863,5.179) v1@56.863,5.893 ; D4.2@57.37,6.104 cw(c56.863,6.608) v1@56.863,5.893 ; D4.2@57.604,5.793 cw(c57.611,4.897) 58.245,5.531 ; D4.2@57.606,5.593 cw(c57.617,4.227) 58.583,5.193 ; D3.1 59.827,9.063 59.827,5.369 59.651,5.193 58.583,5.193 ; D3.1@59.14,9.46 cw(c59.14,8.76) 59.635,9.255 ; D3.1@59.44,9.76 ccw(c60.188,9.76) 59.659,9.231 ; v1@56.863,5.893 D4.2 57.883,5.893 58.583,5.193
  power w0.2: v1(40.17,0.52) 40.212,0.562 47.014,0.562 47.694,1.242 47.694,5.222 48.394,5.922 v1(56.834,5.922) ; v1@40.276,0.414 cw(c40.633,0.057) 40.633,0.562 ; v1@40.276,0.626 ccw(c40.431,0.781) 40.431,0.562 ; v1@56.728,5.816 ccw(c56.472,5.56) 56.472,5.922 ccw(c56.472,6.284) v1@56.728,6.028
LED4: 
NetC1_2: 
NetD5_1: D5.1 R6.1 | length 4.3
  Top Layer w0.2: D5.1 59.254,1.944 R6.1 ; D5.1@59.212,2.138 ccw(c59.679,2.604) 59.679,1.944 ; D5.1@59.353,1.855 cw(c59.57,1.639) 59.57,1.944 ; D5.1@59.353,2.279 ccw(c60.162,3.087) 60.162,1.944 ; R6.1@60.643,1.768 ccw(c60.217,1.341) 60.217,1.944 ccw(c60.217,2.548) R6.1@60.643,2.121
NetD6_2: D6.2 R7.1 | length 12.2
  Top Layer w0.2: D6.2@2.36,14.944 cw(c0.995,13.578) 2.926,13.578 cw(c4.857,13.578) D6.2@3.492,14.944 ; D6.2@2.502,15.086 cw(c1.477,14.061) 2.926,14.061 cw(c4.374,14.061) D6.2@3.35,15.086 ; R7.1@2.63,11.668 ccw(c1.915,12.382) 2.926,12.382 ; D6.2@2.643,15.227 cw(c1.96,14.544) 2.926,14.544 cw(c3.892,14.544) D6.2@3.209,15.227 ; R7.1@2.771,11.526 ccw(c2.398,11.9) 2.926,11.9 ; R7.1 2.926,11.51 D6.2
NetQ1_4: 
NetQ1_6: 
NetR2_2: C18.2 R8.1 U1.6 | length 7.4
  Top Layer w0.254: U1.6 55.642,7.414 C18.2@55.734,7.322 ; U1.6@54.302,7.256 cw(c54.682,6.875) 54.682,7.414 cw(c54.682,7.952) U1.6@54.302,7.572 ; 54.789,7.414 cw(c54.789,6.406) C18.2@55.501,7.119 ; 55.281,7.414 ccw(c55.281,7.725) C18.2@55.501,7.505 ; C18.2@55.551,7.505 ccw(c55.109,7.947) 55.734,7.947 ; R8.1@55.576,8.724 cw(c55.196,8.343) 55.734,8.343 cw(c56.272,8.343) R8.1@55.892,8.724 ; 55.734,7.995 ccw(c56.427,7.995) C18.2@55.937,7.505 ; R8.1 C18.2@55.734,7.322 ; C18.2 C18.2@55.734,7.322
NTC: R4.2 U3.16 | length 2.8
  Top Layer w0.2: U3.16 32.507,2.473 ; R4.2@32.541,2.24 ccw(c32.368,2.334) 32.507,2.473 ; R4.2@32.758,2.37 cw(c32.756,2.722) 32.507,2.473 ; R4.2 32.507,2.473
SW: C9.2 L1.2 U3.2 U3.3 U3.4 U3.5 U3.6
VBUS_A: C6.2 J1.1 Q6.1 Q6.3 U3.11 | length 17.1
  Top Layer w0.2: v1(28.74,1.88) 28.74,1.962 29.05,2.272 ; v1@28.89,1.881 cw(c29.436,1.886) 29.05,2.272 ; U3.11 30.507,3.547 30.29,3.33 29.574,3.33 29.05,2.806 29.05,2.272
  power w0.2: v1@25.354,11.052 cw(c25.354,10.69) 25.61,10.946 cw(c25.866,11.202) v1@25.504,11.202 ; v1(25.354,11.202) 25.694,10.862 25.694,2.712 26.526,1.88 v1(28.74,1.88) ; v1@28.634,1.774 ccw(c28.378,1.518) 28.378,1.88 ccw(c28.378,2.242) v1@28.634,1.986
VBUS_B: C4.2 J3.1 Q5.1 Q5.3 U3.30 | length 14.3
  Top Layer w0.2: v1@34.654,10.584 cw(c34.043,9.973) 34.907,9.973 ; v1(34.76,10.69) 34.907,10.543 U3.30 ; v1@34.795,10.725 cw(c34.526,10.456) 34.907,10.456 ; Q5.1 35.8,18.78 v1(35.83,18.81) ; Q5.1@35.259,18.727 cw(c35.387,18.599) 35.387,18.78 cw(c35.387,18.961) Q5.1@35.259,18.833 ; 35.395,18.78 ccw(c35.395,19.245) v1@35.724,18.916 ; 35.54,18.78 cw(c35.54,18.52) v1@35.724,18.704
  power w0.2: v1(34.76,10.69) 35.45,11.38 35.45,14.632 35.83,15.012 v1(35.83,18.81) ; v1@34.76,10.84 ccw(c34.76,11.202) 35.016,10.946 ccw(c35.272,10.69) v1@34.91,10.69 ; v1@35.724,18.704 cw(c35.468,18.448) 35.83,18.448 cw(c36.192,18.448) v1@35.936,18.704
VBUS_C: C15.2 J2.1 Q7.1 Q7.3 U3.10 | length 32.9
  Top Layer w0.2: v1(28.98,3.52) 29.707,4.247 U3.10 ; v1@28.98,3.67 ccw(c28.98,4.032) 29.236,3.776 ccw(c29.492,3.52) v1@29.13,3.52
  power w0.2: v1@28.945,3.485 ccw(c29.318,3.858) 29.318,3.33 ; v1(28.98,3.52) 29.17,3.33 30.99,3.33 31.554,2.766 41.824,2.766 42.32,3.262 42.32,10.62 41.65,11.29 38.87,11.29 38.19,11.97 38.19,13.71 v1(38.41,13.93) ; v1@29.086,3.626 ccw(c29.801,4.341) 29.801,3.33 ; 38.19,13.037 cw(c39.303,13.037) v1@38.516,13.824 ; 38.19,13.52 cw(c38.82,13.52) v1@38.375,13.965
VCC: C16.2 U3.18 | length 5.3
  Top Layer w0.2: U3.18 33.307,3.463 33.99,2.78 34.884,2.78 35.594,2.07 C16.2 ; 35,2.664 ccw(c35.71,3.374) C16.2@35.71,2.37 ; 35.28,2.385 cw(c34.965,2.07) C16.2@35.41,2.07 ; C16.2@35.342,2.323 ccw(c35.71,2.691) C16.2@35.71,2.17
VDRV: C14.2 U3.8 | length 5.2
  Top Layer w0.2: C14.2 27.847,3.73 28.43,4.313 ; C14.2@27.554,3.829 ccw(c27.648,4.525) 28.145,4.028 ; C14.2@27.581,4.027 ccw(c27.717,5.027) 28.43,4.313 ; U3.8 29.017,5.8 28.43,5.213 28.43,4.313
VOUT: C10.2 C11.2 C12.2 C13.2 C19.1 Q5.2 Q5.5 Q6.2 Q6.5 Q7.2 Q7.5 U3.9 U3.12 U3.25 U3.26 U3.27 U3.28 U3.29 | length 55
  Top Layer w0.2: Q6.2 25.924,12.718 ; Q6.2@25.61,12.665 cw(c25.738,12.537) 25.738,12.718 cw(c25.738,12.899) Q6.2@25.61,12.771 ; v1@26.258,11.518 ccw(c26.002,11.774) 26.364,11.774 ccw(c26.726,11.774) v1@26.47,11.518 ; v1(26.364,11.412) 26.364,12.278 25.924,12.718 ; Q6.5@27.654,12.665 ccw(c27.526,12.537) 27.526,12.718 ccw(c27.526,12.899) Q6.5@27.654,12.771 ; Q6.5 25.924,12.718 ; v1@28.284,3.236 ccw(c27.931,3.589) 28.43,3.589 ; v1(28.39,3.13) 28.43,3.17 28.43,3.748 28.83,4.148 28.83,5.047 29.183,5.4 U3.9 ; 28.43,3.396 ccw(c28.656,3.396) v1@28.496,3.236 ; v1@29.334,1.986 ccw(c29.054,2.266) 29.45,2.266 ; v1(29.44,1.88) 29.45,1.89 29.45,2.64 29.74,2.93 30.56,2.93 30.907,3.277 U3.12 ; 29.45,2.218 ccw(c29.778,2.218) v1@29.546,1.986
  power w0.2: v1@26.214,11.412 cw(c25.852,11.412) 26.108,11.156 cw(c26.364,10.9) v1@26.364,11.262 ; v1(26.364,11.412) 26.094,11.142 26.094,2.878 26.542,2.43 28.968,2.43 29.44,1.958 v1(29.44,1.88) ; v1(28.39,3.13) 28.59,2.93 30.824,2.93 31.388,2.366 41.989,2.366 42.72,3.097 42.72,10.786 41.816,11.69 39.036,11.69 38.74,11.986 v1(38.74,12.79) ; 29.129,2.269 cw(c28.74,1.88) v1@29.29,1.88 ; v1@38.634,12.684 cw(c38.378,12.428) 38.74,12.428 cw(c39.102,12.428) v1@38.846,12.684
WLED: R7.2 U3.20 | length 54.9
  Top Layer w0.254: R7.2 4.307,11.583 v1(4.974,12.25) ; R7.2@4.307,11.714 ccw(c4.307,12.031) R7.2@4.531,11.807 ; R7.2@4.53,11.491 cw(c5.289,11.491) 4.752,12.028 ; 4.657,11.864 cw(c5.155,11.576) v1@5.006,12.131 ; 4.729,11.987 cw(c4.97,11.848) v1@4.973,12.127 ; v1@4.851,12.25 cw(c4.554,12.25) 4.764,12.04 cw(c4.974,11.83) v1@4.974,12.127 ; U3.20@34.134,4.2 34.134,3.85 34.377,3.607 36.101,3.607 38.07,1.638 v1(38.07,0.52) ; v1@37.983,0.607 ccw(c37.773,0.817) 38.07,0.817 ccw(c38.367,0.817) v1@38.157,0.607
  power w0.254: v1(4.974,12.25) 6.71,12.25 7.463,11.497 7.463,5.277 7.964,4.776 10.762,4.776 11.186,4.352 11.186,1.302 12.097,0.39 35.4,0.39 36.106,1.097 37.609,1.097 38.07,0.636 v1(38.07,0.52) ; v1@5.061,12.163 cw(c5.271,11.953) 5.271,12.25 cw(c5.271,12.547) v1@5.061,12.337 ; 37.778,0.928 cw(c37.37,0.52) v1@37.947,0.52
pads on no net: S1.5 S1.6 U3.24 U3.34 U3.35
copper on no net: | length 15.1
  Top Layer w0.203: 3.087,8.049 ccw(c1.884,8.049) 3.087,8.049 ; 63.299,17.118 ccw(c62.096,17.118) 63.299,17.118

## Polygon pours and split planes (outlines as drawn)
AGND on Bottom Layer "Top Layer-No Net" (solid, remove dead copper, pour order 27): -0.811,25.905 -0.811,-0.063 -0.453,-0.421 0.048,-0.921 66.219,-0.921 66.219,26.334 67.792,27.908
B- on Top Layer "Top Layer-No Net" (solid, remove dead copper, pour order 31): 49.214,9.722 49.214,5.322 48.724,4.832 48.714,4.822 48.714,4.552 48.714,0.092 48.844,-0.038 48.874,-0.008 49.134,-0.008 54.714,-0.008 55.174,0.452 55.164,0.462 55.164,0.872 55.164,4.154 56.384,5.375 56.394,5.384 56.394,5.842 56.394,6.332 56.114,6.612 55.484,6.612 53.004,6.612 52.774,6.842 52.744,6.872 52.744,7.592 52.744,7.762 53.004,8.022 53.284,8.022 54.454,8.022 54.784,8.352 54.754,8.382 54.754,10.292 54.754,10.352 54.484,10.622 54.444,10.662 53.824,10.662 49.594,10.662 49.214,10.282 49.214,9.722
VBUS_A on Top Layer "Top Layer-No Net" (solid, remove dead copper, pour order 23): 19.134,14.022 19.724,14.022 19.914,13.832 19.924,13.822 19.924,13.542 19.924,12.292 20.224,11.992 20.724,11.992 22.644,11.992 23.014,12.362 23.154,12.502 23.154,12.972 23.154,15.832 23.454,16.132 23.464,16.142 24.074,16.142 26.264,16.142 26.434,15.972 26.434,15.632 26.434,13.572 26.334,13.472 26.324,13.462 25.584,13.462 25.584,12.392 25.774,12.202 25.857,12.119 25.857,11.393 25.857,10.715 25.344,10.202 25.324,10.182 18.544,10.182 18.484,10.182 18.004,10.662 17.924,10.742 17.924,12.482 17.924,13.812 18.134,14.022 19.134,14.022
VOUT on Top Layer "Top Layer-No Net" (solid, remove dead copper, pour order 20): 26.139,13.293 28.481,13.293 28.714,13.042 28.714,12.436 28.714,12.406 28.657,12.345 28.478,12.151 28.384,12.151 24.791,12.151 24.734,12.212 24.734,13.178 24.834,13.286 24.841,13.293 26.139,13.293
AGND on Top Layer "Top Layer-No Net" (solid, remove dead copper, pour order 29): -0.578,24.846 -0.938,24.486 -0.938,-0.737 65.326,-0.737 65.566,-0.977 64.847,-0.258 64.847,26.523 0.8,26.523 -0.698,25.025
VOUT on Top Layer "Top Layer-No Net" (solid, pour order 22): 24.791,12.151 24.794,12.154 36.14,12.154 36.206,12.22 36.73,12.22 39.91,12.22 40,12.31 40,13.24 39.882,13.358 39.795,13.358 35.372,13.358 34.88,13.85 34.85,13.88 34.85,14.19 34.823,14.217 34.823,15.655 34.823,19.277 34.69,19.41 33.85,19.41 33.709,19.269 33.7,19.26 33.7,18.73 33.7,15.41 33.45,15.16 31.54,15.16 29.96,15.16 29.54,14.74 29.54,13.91 28.923,13.293 24.841,13.293 24.841,13.285 24.734,13.178 24.734,12.212 24.734,12.207 24.791,12.151
VOUT on Top Layer "Top Layer-No Net" (solid, pour order 25): 34.907,8.2 35.007,8.3 35.3,8.3 35.57,8.3 35.76,8.49 36.12,8.85 36.12,9.4 36.12,9.97 33.89,12.2 33.53,12.56 33.53,13.42 35.31,13.42 35.37,13.36 36.26,13.36 38.46,13.36 38.66,13.16 38.74,13.08 38.74,11.986 38.74,11.42 38.87,11.29 39.23,10.93 39.23,10.61 39.23,4.24 39.02,4.03 38.2,4.03 38,4.03 37.72,4.31 37.72,4.46 37.72,5.62 37.3,6.04 36.84,6.5 34.91,6.5 34.5,6.5 34.5,6.6 34.5,8.14 34.56,8.2 34.907,8.2
SW on Top Layer "Top Layer-No Net" (solid, pour order 26): 29.707,8.2 29.607,8.3 29.3,8.3 22.33,8.3 22.09,8.06 22.09,7.79 22.09,4.17 22.3,3.96 22.57,3.96 26.3,3.96 26.63,4.29 26.64,4.3 26.64,4.75 26.64,6.01 26.97,6.34 27.13,6.5 29.3,6.5 29.607,6.5 29.707,6.6 29.707,8.2
BAT on Top Layer "Top Layer-No Net" (solid, pour order 28): 11.11,0.57 11.11,0.27 10.85,0.01 10.84,0 10.44,0 4.84,0 4.38,0.46 4.38,2.24 4.38,4.996 3.63,5.746 3.6,5.776 3.6,8.17 4.47,9.04 6.33,9.04 6.94,9.04 7.09,9.04 7.31,9.26 7.31,9.78 7.31,10.457 7.463,10.61 8.21,10.61 8.31,10.61 8.43,10.49 8.43,9.47 8.27,9.31 7.59,8.63 7.59,8.5 7.59,6.66 9.3,4.95 11.07,4.95 11.55,4.47 11.55,3.9 11.55,0.71 11.11,0.27
BATCSP on Top Layer "Top Layer-No Net" (solid, pour order 30): 12.77,4.07 12.65,4.07 12.44,4.07 12.32,4.19 12.32,4.4 12.32,5.04 12.32,6.3 11.51,7.11 9.67,7.11 9.67,7.63 9.67,8.53 9.24,8.96 8.85,9.35 8.85,9.76 8.85,10.34 8.98,10.47 9.66,10.47 9.67,10.47 9.83,10.31 9.83,10.01 9.83,9.67 10.17,9.33 10.49,9.01 11.15,9.01 16.2,9.01 16.87,8.34 16.88,8.33 16.88,7.57 16.88,4.105 16.565,3.791 16.565,3.79 15.83,3.79 12.51,3.79 12.32,3.98 12.32,4.19
BATCSP on Top Layer "Top Layer-No Net" (solid, pour order 32): 12.32,4.19 12.32,4.02 12.5,3.84 12.55,3.79 12.77,3.79 12.87,3.79 12.94,3.86 13.04,3.96 13.04,4.19 13.04,4.24 12.94,4.34 12.88,4.4 12.32,4.4 12.32,4.19
VBUS_B on Top Layer "Top Layer-No Net" (solid, pour order 33): 33.06,21.75 33.06,21.56 33.06,20.29 32.77,20 32.59,19.82 32.21,19.82 31.29,19.82 31,19.53 30.79,19.32 30.79,18.38 30.79,18.2 31.08,17.91 31.8,17.91 35.96,17.91 36.37,18.32 36.41,18.36 36.41,18.94 36.41,20.09 36.06,20.44 36.03,20.47 35.07,20.47 34.02,20.47 33.68,20.81 33.58,20.91 33.58,21.48 33.58,21.71 33.54,21.75 33.06,21.75
VBUS_B on Top Layer "Top Layer-No Net" (solid, pour order 34): 31.29,19.82 31.03,19.82 30.79,19.58 30.79,18.2
VBUS_C on Top Layer "Top Layer-No Net" (solid, pour order 35): 38.1,15.7 38.4,16 40.6,16 40.927,15.673 40.927,14.115 40.927,13.723 41.5,13.15 41.527,13.123 44.707,13.123 50.473,13.123 50.85,13.5 50.85,14.9 51.2,15.25 52.55,15.25 52.65,15.25 53,14.9 53,12.05 52.4,11.45 38.998,11.45 38.33,11.45 38.2,11.58 38.1,11.68 38.1,15.7
VBUS_A on Top Layer "Top Layer-No Net" (solid, pour order 36): 17.924,10.742 17.924,11.393 17.924,14.724 18.3,15.1 19.5,15.1 19.56,15.1 19.92,14.74 19.924,14.736 19.924,13.822 19.924,13.254 19.69,13.02 19.62,12.95 19.02,12.95 18.14,12.95 17.97,13.12 17.924,13.166 17.924,13.812
SW on Top Layer "Top Layer-No Net" (solid, pour order 37): 29.25,8.3 30.07,8.3 30.1,8.27 30.1,8.26 30.1,6.59 30.01,6.5 29.97,6.5 29.59,6.5 29.34,6.75 29.33,6.76 29.33,7.03 29.11,7.25 29.01,7.35 29.01,8.05 29.01,8.16 29.11,8.26 29.15,8.3 29.25,8.3
AGND on power "Top Layer-No Net" (solid, remove dead copper, pour order 24): -0.799,25.65 -0.942,25.507 -0.942,-0.604 65.658,-0.604 66.159,-0.103 66.159,27.796
AGND on Signal "Top Layer-No Net" (solid, remove dead copper, pour order 21): -0.535,25.513 -0.535,-0.312 -0.178,-0.67 -0.035,-0.813 67.138,-0.813 67.138,27.873 66.852,28.159
AGND on Bottom Solder "Top Layer-No Net" (solid): 28.94,9.071 33.774,9.071 36.677,11.975 37.033,12.33 39.776,12.33 42.493,12.33 43.517,11.306 43.713,11.11 43.713,4.714 43.713,3.261 42.401,1.949 42.261,1.81 34.747,1.81 31.954,1.81 30.892,2.871 29.785,3.979 28.98,3.979 14.51,3.979 13.992,4.497 13.915,4.574 13.915,7.569 13.915,7.762 14.48,8.327 15.225,9.071 28.94,9.071

## Keep-outs
Keep-Out Layer:
  circle w0.127: c1.92,2 r1
  circle w0.127: c2.12,21 r0.9
  circle w0.127: c61.88,21 r0.9
  circle w0.127: c1.92,2 r1
  lines w0.127: -4,24 0,24 ; 0,-3.488 0,0.012 ; 0,1.143 0,0 1.084,0 ; 0,17.983 0,19 cw(c7,19) 1.344,23.124 ; 0,18 0,1 ccw(c1,1) 1,0 63,0 ccw(c63,1) 64,1 ; 0,18.771 0,24 ; 1.33,23.12 cw(c3.454,20.995) 3.454,24 ; 8.5,24 8.798,24 ; 8.754,16.841 8.754,24 ; 22.214,16.841 22.214,24 ; 22.27,24 27.75,24 27.75,26 36.25,26 36.25,24 41.701,24 41.749,24 ; 22.479,24 22.214,24 ; 55.22,24 59.944,24 60.376,24 ; 62.963,0 64,0 ; 62.967,22.654 62.5,23.12 ccw(c60.376,20.995) 60.376,24 ; 62.971,22.653 cw(c57,19) 64,19 ; 64,-3.488 64,0.012 ; 64,3.5 64,8.5 ; 64,4.987 64,0.987 64,0 ; 64,5.2 64,1 ; 64,6.187 64,18.987 ; 64,7.2 64,18 ; 64,18.094 64,24 ; 64,18.771 64,24 ; 65,0 cw(c65,1) 64,1 ; 65.084,0 64,0 ; 65.344,23.124 ccw(c71,19) 64,19 ; 66.101,24 64,24 ; 0,24 2.101,24 8.636,24 ; 2,5 0,5 2,5 ; 2,5 2,6.2 ; 2,5 2,6.2 ; 2,6.2 0,6.2 2,6.2 ; 8.636,24 ccw(c8.636,24) 8.636,24 ; 22.214,24 22.214,24 ; 41.749,24 41.749,24 ; 60.376,24 64,24 ; 64,0 64,1.143 64,0 ; 64,0 64,1 ; 64,1 64,18 ; 64,1 64,18 ; 64,18 64,19 ; 64,19 64,17.983 64,19 ; 64,5 66,5 64,5 ; 64,6.2 66,6.2 64,6.2

## Silkscreen, mask and mechanical layers (free items; w line width, h text height)
Top Overlay:
  text "+" at 58.674,18.793 h0.6
  text "+" at 58.699,14.881 h0.6
  text "+" at 58.623,10.944 h0.6
  text "+" at 58.598,7.388 h0.6
  text "4" at -2.54,7.109 h0.6
  text "B+" at 6.891,4.819 h1.2
  text "+" at 58.623,3.528 h0.6
  text "B-" at 46.367,3.26 h1.2
  text "4" at -2.667,-23.777 h0.6
  text "4" at -2.667,-54.384 h0.6
Bottom Overlay:
  drawing of 4883 lines, arcs and shapes, not listed
  text "B+" at 8.848,4.73 h1.2
  text "B-" at 52.935,4.628 h1.2
  text "SW6121_DEMO_20180228" at 56.408,1.369 h1 r270
Mechanical 1:
  drawing of 163 lines, arcs and shapes, not listed